# EAGLE board mainFinal (EAGLE 9.2.2)

Size 240.31 x 145.31 mm. Coordinates in mm from the lower left corner, seen from the top.
Outline: 80.31,45.31 240.31,45.31 240.31,145.31 80.31,145.31 80.31,45.31
Copper layers (1*16): Top 0.035mm / dielectric 1.5mm / Bottom 0.035mm
Design rules "default": minimum track width 6mil, minimum drill 0.35mm, track to track 6mil, track to pad 6mil, pad to pad 6mil, via to via 6mil, smd to smd 6mil, copper to edge 40mil, drill to drill 6mil, minimum pad ring 10mil, minimum via ring 8mil, stop-mask expansion 4mil, vias tented up to drill 0mil, thermal gap 10mil

## Footprints (pad centres in the part's own frame; a part is rotated, then mirrored left to right if it is on the bottom)
78XXS = drill 1.016 long: GND 0,-2.54; IN -2.54,-2.54; OUT 2.54,-2.54
DEANS = drill 1.27 pad 3.556 long: + 0,0; - 0.737,-6.921
2X5-SHROUDED_LOCK = drill 1.016 pad 1.88: 1 -1.397,5.08; 2 1.397,5.08; 3 -1.397,2.54; 4 1.397,2.54; 5 -1.397,0; 6 1.397,0; 7 -1.397,-2.54; 8 1.397,-2.54; 9 -1.397,-5.08; 10 1.397,-5.08
LED3MM = drill 0.813 octagon: A -1.27,0; K 1.27,0
ARDUINO-NANO-3.0 = drill 1 square: J1.1 17.78,7.62 | drill 1: J1.2 15.24,7.62; J1.3 12.7,7.62; J1.4 10.16,7.62; J1.5 7.62,7.62; J1.6 5.08,7.62; J1.7 2.54,7.62; J1.8 0,7.62; J1.9 -2.54,7.62; J1.10 -5.08,7.62; J1.11 -7.62,7.62; J1.12 -10.16,7.62; J1.13 -12.7,7.62; J1.14 -15.24,7.62; J1.15 -17.78,7.62; J2.1 17.78,-7.62; J2.2 15.24,-7.62; J2.3 12.7,-7.62; J2.4 10.16,-7.62; J2.5 7.62,-7.62; J2.6 5.08,-7.62; J2.7 2.54,-7.62; J2.8 0,-7.62; J2.9 -2.54,-7.62; J2.10 -5.08,-7.62; J2.11 -7.62,-7.62; J2.12 -10.16,-7.62; J2.13 -12.7,-7.62; J2.14 -15.24,-7.62; J2.15 -17.78,-7.62 | hole 1.651: -20.32,7.62; -20.32,-7.62; 20.32,-7.62; 20.32,7.62
DIL04 = drill 0.813 offset: 1 -1.27,-3.81; 2 1.27,-3.81; 3 1.27,3.81; 4 -1.27,3.81
TO220BV = drill 1.016 long: D 0,-2.54; G -2.54,-2.54; S 2.54,-2.54
TO220V = drill 1.016 long: 1 -2.54,0; 2 0,0; 3 2.54,0
0204/7 = drill 0.813 octagon: 1 -3.81,0; 2 3.81,0
TSOP3XXX = drill 1 pad 1.93 long: 1 -2.54,0; 2 0,0; 3 5.08,0
DIGITAL_ISOLATOR_MODULE = drill 0.9 pad 1.778: 1 3.175,26.67; 2 3.175,24.13; 3 3.175,21.59; 4 3.175,19.05; 5 3.175,16.51; 6 3.175,13.97; 7 3.175,11.43; 8 3.175,8.89; 9 3.175,6.35; 10 3.175,3.81; 11 22.225,3.81; 12 22.225,6.35; 13 22.225,8.89; 14 22.225,11.43; 15 22.225,13.97; 16 22.225,16.51; 17 22.225,19.05; 18 22.225,21.59; 19 22.225,24.13; 20 22.225,26.67
SERVO_CONTROLLER = drill 1 pad 1.93 long: 0 6.35,34.29; 1 6.35,31.75; 2 6.35,29.21; 3 6.35,26.67; 4 6.35,24.13; 5 6.35,21.59; 6 6.35,16.51; 7 6.35,13.97; 8 6.35,11.43; 9 6.35,8.89; 10 6.35,6.35; 11 6.35,3.81; +5V(OUT) 6.35,19.05; ERR 26.67,12.7; GND 26.67,25.4; RST' 26.67,15.24; RX 26.67,20.32; TX 26.67,17.78; TXIN 26.67,10.16; VIN 26.67,22.86; VSRV 6.35,1.27

## Placement (x,y rotation side)
IC1  [78XXS]  61.26,113.89 0 top
IC2  [78XXS]  49.83,113.89 0 top
IC3  [78XXS]  38.4,113.89 0 top
J1  [DEANS]  2.84,9.75 0 top
J2  [2X5-SHROUDED_LOCK]  -7.32,8.48 0 top  (outside the outline)
J3  [2X5-SHROUDED_LOCK]  -17.48,8.48 0 top  (outside the outline)
LED1  LED3MM  [LED3MM]  21.89,108.81 0 top
M1  ARDUINO-NANO-3.0  [ARDUINO-NANO-3.0]  30.78,32.61 0 top
M2  ARDUINO-NANO-3.0  [ARDUINO-NANO-3.0]  30.78,8.48 0 top
OK1  TIL191  [DIL04]  62.53,91.03 0 top
OK2  TIL191  [DIL04]  52.37,91.03 0 top
Q1  IRF512  [TO220BV]  30.78,93.57 0 top
Q2  MOSFET-PCHANNELFQP27P06  [TO220V]  43.48,101.19 0 top
Q3  MOSFET-PCHANNELFQP27P06  [TO220V]  13,101.19 0 top
R1  [0204/7]  14.27,107.54 0 top
R2  [0204/7]  -17.48,-6.76 0 top  (outside the outline)
R3  [0204/7]  -17.48,-11.84 0 top  (outside the outline)
R4  [0204/7]  -17.48,-16.92 0 top  (outside the outline)
U$1  TSOP34X  [TSOP3XXX]  40.94,91.03 0 top
U$2  DIGITAL_ISOLATOR  [DIGITAL_ISOLATOR_MODULE]  10.46,46.58 0 top
U$3  SERVO_CONTROLLER  [SERVO_CONTROLLER]  38.4,46.58 0 top
U$4  [L298N]  134.92,88.49 0 top

## Library data of the parts
IC1-IC3 = v-reg
J1 = SparkFun-Connectors; SF_ID: PRT-11864
J2 J3 = SparkFun-Connectors; PROD_ID: CONN-08671; SF_ID: PRT-08506
LED1 U$1 = CEDT_JANUARY_2015_v5
M1 M2 = diy-modules
OK1 OK2 = optocoupler; OC_FARNELL: 1683363; OC_NEWARK: unknown
Q1 = transistor-power
Q2 Q3 = SparkFun-DiscreteSemi
R1-R4 = rcl; SPICEPREFIX: R
U$2 = ISO7330C DIGITAL ISOLATOR MODULE
U$3 = Servo Controller
U$4 = l298n

## Nets
3V3: M1.J2.14 M2.J2.14
5V: M1.J2.4 M2.J2.4
GND: U$1.1
GND.1: M1.J1.4 M2.J1.4
GND.2: M1.J2.2 M2.J2.2
N$2: OK1.4 Q2.1 R4.1
N$3: Q2.2 R4.2
N$4: OK1.3 Q2.3
VCC: U$1.2
VIN: M1.J2.1 M2.J2.1

## Tracks (layer width: path | path; a pad name or v marks a point on that pad's centre or on a via)
3V3  (1 unrouted)
5V  (1 unrouted)
GND.1  (1 unrouted)
GND.2  (1 unrouted)
N$2  (2 unrouted)
N$3  (1 unrouted)
N$4  (1 unrouted)
VIN  (1 unrouted)